# Altium PCB ESP32_BDB.PcbDoc (part 2 of 2)
Units mil, origin at the board's own origin, x right, y up, seen from the top; angles counter-clockwise.
Board outline 3000 x 3000 mil, 4 copper layers (Top Layer, Layer 1, Layer 2, Bottom Layer), stack 62.449 mil thick; 80 components, 64 nets, 287 pads, 205 vias.
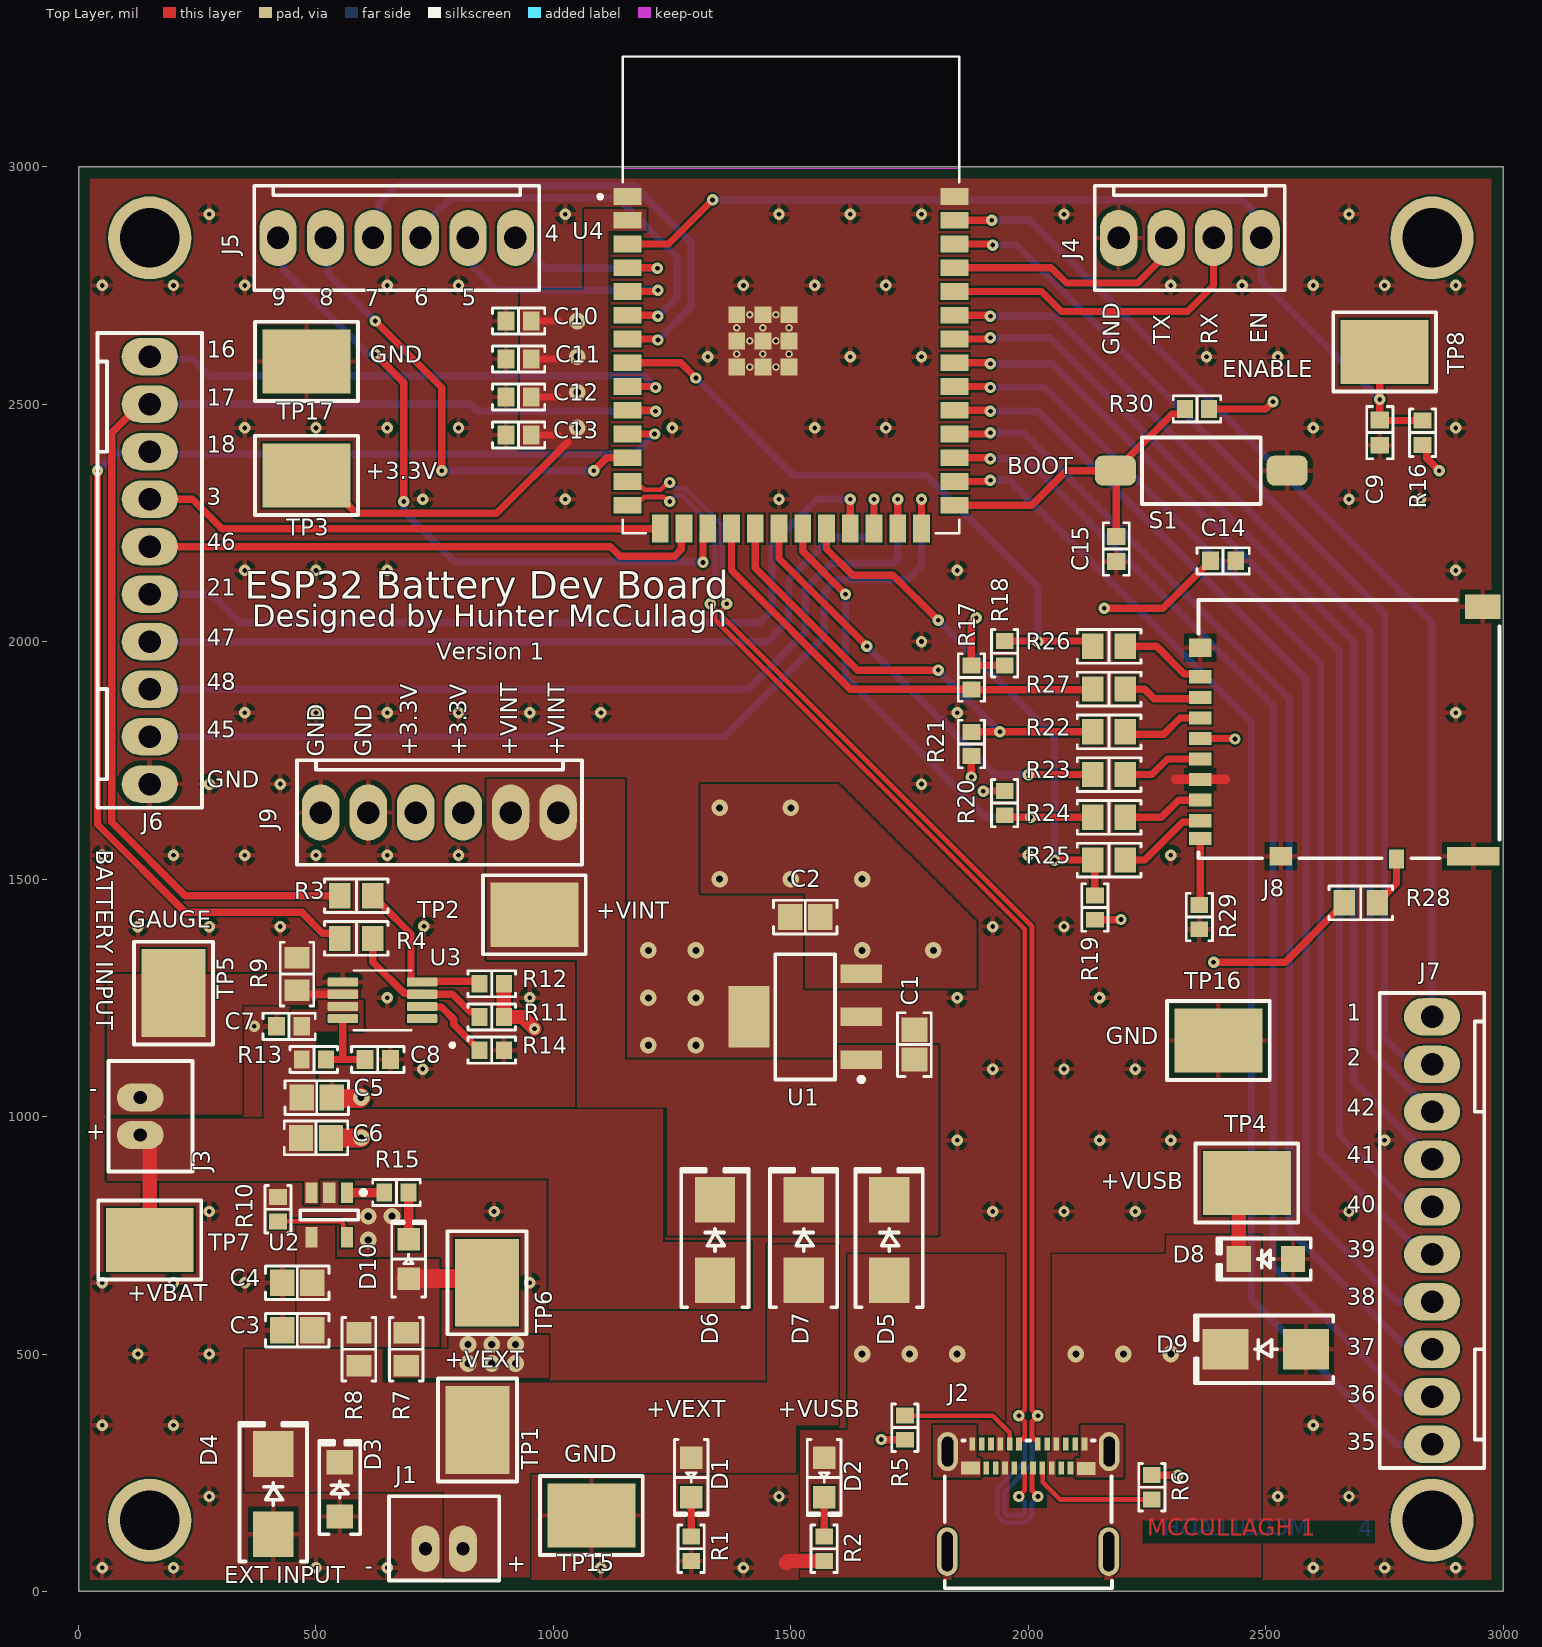
[diagram p0: Top Layer view]

## Part data (continued)
U2: library part CMP-0133-00137-1, "Miniature Single-Cell, Fully Integrated Li-Ion, Li-Polymer Charge Management Controller, 4.4V, 5-Pin SOT-23, Industrial Temperature, Tape and Reel", Code_IPC=SOT23-5, DatasheetVersion="revE, Sep-2008", PackageDescription="5-Lead Plastic Small Outline Transistor (OT) [SOT-23]", PackageReference=SOT-23-OT5, PackageVersion="revBB, Aug-2009"
U3: "Battery Battery Monitor IC Lithium Ion 8-MiniSO", Package="TSSOP-8 STMicroelectronics", Check_prices=https://www.snapeda.com/parts/STC3100IST/STMicroelectronics/view-part/?ref=eda, MF=STMicroelectronics, MP=STC3100IST, SnapEDA_Link=https://www.snapeda.com/parts/STC3100IST/STMicroelectronics/view-part/?ref=snap
U4: "Bluetooth, WiFi 802.11b/g/n, Bluetooth v5.0 Transceiver Module 2.4GHz PCB Trace Surface Mount", Package=None, Availability="In Stock", Check_prices=https://www.snapeda.com/parts/ESP32-S3-WROOM-1-N4R2/Espressif+Systems/view-part/?ref=eda, MF="Espressif Systems", MP=ESP32-S3-WROOM-1-N4R2, Price=None, Purchase-URL=https://pricing.snapeda.com/search/part/ESP32-S3-WROOM-1-N4R2/?ref=eda, SnapEDA_Link=https://www.snapeda.com/parts/ESP32-S3-WROOM-1-N4R2/Espressif+Systems/view-part/?ref=snap

## Free pads (board coordinates)
  round 175 hole 125 mask+0: 7(150,150) 7(150,2850) 7(2850,150) 7(2850,2850)

## Via types
v1: diameter 24, hole 10, Top Layer to Bottom Layer, tented both sides, 171 vias
v2: diameter 35, hole 15, Top Layer to Bottom Layer, tented both sides, 34 vias

## Nets (pads, with @x,y where several pads share a name; then routed paths per layer and width w, separated by ;. In a path a pad name is that pad's centre, name@x,y a point inside that pad or via, vN(x,y) a via of type N, cw(c..) or ccw(c..) an arc to the next point about the centre after c; other vN are vias at no path point)
+3v3: C2.2 C10.2 C11.2 C12.2 C13.2 C14.2 J8.4 J9.3 J9.4 R11.2 R12.2 R16.2 R17.2 R18.2 R19.2 R20.2 R21.2 R28.1 R30.2 TP3.1 U1.3 U4.2 | length 2216.5
  Top Layer w15: C13.2 1010,2435 ; C12.2 1010,2515 ; C11.2 1010,2595 ; C10.2 1010,2675
  Top Layer w15.33: TP3.1 505,2350 585,2270 880,2270 1030,2420 ; R21.2 v1(1880,1715) v1@1881.66,1713.34 ; v1(1890,2050) 1880,2040 R17.2 R18.2 ; v1@1905,1685.59 R20.2 ; R19.2 2194.41,1414.41 v1(2195,1415) ; v1(2160,2070) 2283.43,2070 2371.41,2157.98 2373.38,2157.98 2383.43,2168.03 C14.2 ; J8.4 2433.94,1796.06 v1(2435,1795) ; R30.2 2500,2490 v1(2515,2505) ; v1(2390,1325) 2540.55,1325 2646.64,1431.09 2650.58,1431.09 2665.55,1446.06 R28.1 ; R16.2 2838.94,2405.47 2838.94,2386.06 v1(2865,2360)
  Top Layer w30: R12.2 R11.2 935.38,1209.62 v1(960,1185)
  other v1: 1905,1685
  other v2: 1650,1350 1800,1350 1350,1500 1500,1500 1650,1500 1350,1650 1500,1650 1050,2450 1050,2525 1050,2600 1050,2675
+VBAT: C5.2 C6.2 C7.2 D6.1 J3.1 R13.1 TP7.1 U2.3 U3.7 | length 229.5
  Top Layer w30: J3.1 150,941.26 TP7.1
+VEXT: D1.1 D3.2 D4.2 D7.1 J1.1 R8.2 TP1.1
+VINT: C1.2 D5.2 D6.2 D7.2 J9.1 J9.2 TP2.1 U1.1
+VUSB: D2.1 D5.1 D8.2 D9.2 J2.A4 J2.A9 J2.B4 J2.B9 R7.2 TP4.1 | length 167.1
  Top Layer w10: TP4.1@2442.91,842.91 TP4.1
  Top Layer w30: D8.2 TP4.1@2442.91,842.91
  other v2: 820,480 870,480 920,480 1650,500 1750,500 1850,500 2100,500 2200,500 2300,500 820,520 870,520 920,520
BATTERY_GAUGE: J3.2 R9.1 TP5.1 U3.6 | length 99.9
  Top Layer w15.33: R9.1 468.14,1257.41 U3.6
D_N: J2.A7 J2.B7 U4.13 | length 2866.8
  Top Layer w10: v1@2019.68,369.68 v1(2020,370)
  Top Layer w10.26: U4.13 1168.1,2324.5 1186.74,2324.5 1191.52,2319.72 1226,2319.72 1241.28,2335 v1(1245,2335) ; v1(1365,2080) 1365,2076.63 1355.13,2066.76 1355.13,2052.87 2007.63,1400.37 2007.63,520 2007.63,420 2007.63,382.88 2020,370.51 v1(2020,370) 2020,369.49 2007.63,357.12 2007.63,325.45 2013.65,319.43 2018.91,319.43 2019.68,318.66 J2.A7 ; v1(1980,200) 1980,200.51 1992.37,212.88 1992.37,249.52 1990.16,251.73 J2.B7
  Bottom Layer w10.26: v1(1245,2335) 1245.51,2335 1257.88,2322.63 1277.33,2322.63 1355.13,2244.83 1355.13,2093.24 1365,2083.37 v1(1365,2080) ; v1(1980,200) 1980,199.49 1992.37,187.12 1992.37,166.01 1986.35,160 1956.01,160 1950,166.01 1950,210 2007.63,267.63 2007.63,357.12 2020,369.49 v1(2020,370)
D_P: J2.A6 J2.B6 U4.14 | length 2889.7
  Top Layer w10: v1(1980,370) v1@1980.32,369.68
  Top Layer w10.26: U4.14 1168.1,2299.67 1186.74,2299.67 1191.52,2304.45 1232.07,2304.45 1241.52,2295 v1(1245,2295) ; v1(1330,2080) 1330,2076.63 1339.87,2066.76 1339.87,2046.54 1992.37,1394.04 1992.37,382.88 1980,370.51 v1(1980,370) 1980,369.49 1992.37,357.12 1992.37,325.45 1986.35,319.43 1981.09,319.43 1980.32,318.66 J2.A6 ; J2.B6 2009.84,251.73 2007.63,249.52 2007.63,212.88 2020,200.51 v1(2020,200)
  Bottom Layer w10.26: v1(1245,2295) 1245.51,2295 1257.88,2307.37 1271,2307.37 1339.87,2238.5 1339.87,2093.24 1330,2083.37 v1(1330,2080) ; v1(1980,370) 1980,369.49 1992.37,357.12 1992.37,273.96 1934.74,216.32 1934.74,159.69 1949.69,144.74 1992.68,144.74 2007.63,159.69 2007.63,187.12 2020,199.49 v1(2020,200)
DAT1: R19.1 R25.1 U4.22 | length 1103.3
  Top Layer w15.33: U4.22 1575,2195 1630,2140 1715,2140 v1(1810,2045) ; v1(2055,1540) R25.1 2140,1535.55 R19.1
  Bottom Layer w15.33: v1(1810,2045) 2055,1800 v1(2055,1540)
DAT2: R18.1 R26.1 U4.8 | length 1365.2
  Top Layer w15.33: U4.8 1267.91,2587.09 v1(1300,2555) ; R18.1 2124.37,2001.18 R26.1
  Bottom Layer w15.33: v1(1300,2555) 1505,2350 1785,2350 2020,2115 v1(2020,2000)
ENABLE: C9.2 J4.1 R16.1 TP8.1 U4.3 | length 2111.1
  Top Layer w15.33: U4.3 1242.09,2837.09 v1(1335,2930) ; TP8.1 2740,2600 v1(2740,2510) C9.2 2740.98,2465.59 R16.1
  Bottom Layer w15.33: v1(1335,2930) 2450,2930 2471.39,2908.61 2471.39,2905.45 2490,2886.84 J4.1 2490,2760 v1(2740,2510)
GND: C1.1 C2.1 C3.1 C4.1 C5.1 C6.1 C7.1 C8.1 C9.1 C10.1 C11.1 C12.1 C13.1 C14.1 C15.1 D3.1 D4.1 D8.1 D9.1 J1.2 J2.A1 J2.A12 J2.B1 J2.B12 J2.S J4.4 J6.10 J8.6 J8.S J9.5 J9.6 R1.2 R2.2 R5.2 R6.2 R9.2 R10.1 R14.2 R29.1 S1.1 TP15.1 TP16.1 TP17.1 U1.2 U1.4 U2.2 U3.5 U4.1 U4.40 U4.41_1 U4.41_2 U4.41_3 U4.41_4 U4.41_5 U4.41_6 U4.41_7 U4.41_8 U4.41_9 U4.41_10 U4.41_11 U4.41_12 U4.41_13 U4.41_14 U4.41_15 U4.41_16 U4.41_17 U4.41_18 U4.41_19 U4.41_20 U4.41_21 | length 459.2
  Top Layer w15.33: v1(1690,320) 1690.59,319.41 R5.2 ; J2.S@1817,319.41 1829.92,306.49 J2.S@1829.92,294.65 ; R6.2 v1(2315,245)
  Top Layer w20: 2310,1710 2415,1710
  Top Layer w30: 1490,60 1494.41,64.41 R2.2
  Top Layer w40: C5.1 534.99,1038 593,1038 v2(595,1040) ; C6.1@537.09,962.56 531.5,956.97 C6.1 v2(595,955)
  other v1: 50,50 200,50 500,50 650,50 1100,50 1400,50 2600,50 2750,50 2900,50 275,200 1475,200 2525,200 2675,200 50,350 200,350 2600,350 125,500 275,500 50,650 200,650 350,650 950,650 275,800 875,800 1925,800 2075,800 2225,800 2675,800 1850,950 2150,950 2300,950 2750,950 725,1100 1925,1100 2075,1100 2225,1100 370,1190 650,1250 950,1250 1850,1250 2150,1250 125,1400 275,1400 425,1400 1925,1400 2075,1400 727.3,1400.53 50,1550 200,1550 350,1550 500,1550 650,1550 800,1550 2000,1550 2300,1550 275,1700 425,1700 1775,1700 350,1850 500,1850 650,1850 800,1850 950,1850 1100,1850 1850,1850 2900,1850 1775,2000 350,2150 500,2150 650,2150 1850,2150 2900,2150 725,2300 1025,2300 1475,2300 2675,2300 2825,2300 350,2450 500,2450 650,2450 800,2450 1250,2450 1550,2450 1700,2450 2600,2450 2900,2450 1325,2600 1625,2600 1775,2600 2375,2600 2525,2600 50,2750 200,2750 350,2750 650,2750 800,2750 1400,2750 1550,2750 1700,2750 2300,2750 2450,2750 2600,2750 2750,2750 2900,2750 275,2900 1025,2900 1475,2900 1625,2900 1775,2900 2075,2900 2675,2900
  other v2: 610,740 610,790 660,790 1200,1150 1300,1150 1200,1250 1300,1250 1200,1350 1300,1350
GPIO0: C15.2 R30.1 S1.2 U4.27 | length 713.2
  Top Layer w15.33: U4.27 2007.09,2287.09 2080,2360 S1.2 ; C15.2 2185,2358.19 S1.2 ; R30.1 2329.41,2488.53 2320.34,2479.46 2302.65,2479.46 2213.64,2390.45 2213.64,2383.21 2190.43,2360 S1.2
GPIO1: J7.10 U4.39 | length 2189.3
  Top Layer w15.33: U4.39 v1(1922.91,2887.09) v1@1925,2885
  Bottom Layer w15.33: v1(1922.91,2887.09) 2002.91,2887.09 2850,2040 J7.10
GPIO2: J7.9 U4.38 | length 2246
  Top Layer w15.33: U4.38 1920.57,2837.09 1922.65,2835 v1(1925,2835)
  Bottom Layer w15.33: v1(1925,2835) 1926.04,2836.04 1973.96,2836.04 2750,2060 2750,1165 2792.87,1122.13 2837.87,1122.13 J7.9
GPIO3: J6.4 U4.15 | length 1100.7
  Top Layer w15.33: J6.4 240,2300 302.13,2237.87 U4.15
GPIO4: J5.1 U4.4 | length 392.3
  Top Layer w15.33: U4.4 1217.91,2787.09 v1(1218.96,2786.04) v1@1220,2785
  Bottom Layer w15.33: J5.1 920,2847.47 956.08,2811.39 958.61,2811.39 983.96,2786.04 v1(1218.96,2786.04)
GPIO5: J5.2 U4.5 | length 540.5
  Top Layer w15.33: U4.5 1217.09,2737.09 v1(1220,2740)
  Bottom Layer w15.33: J5.2 832.13,2837.87 832.13,2787.87 880,2740 v1(1220,2740)
GPIO6: J5.3 U4.6 | length 845.3
  Top Layer w15.33: U4.6 1217.91,2687.09 v1(1220,2685)
  Bottom Layer w15.33: J5.3 720,2870 784.67,2934.67 1135.33,2934.67 1260,2810 1260,2725 v1(1220,2685)
GPIO7: J5.4 U4.7 | length 1099.8
  Top Layer w15.33: U4.7 1217.91,2637.09 v1(1220,2635)
  Bottom Layer w15.33: J5.4 632.13,2862.13 632.13,2922.13 670,2960 1170,2960 1290,2840 1290,2705 v1(1220,2635)
GPIO8: J5.5 U4.12 | length 993.2
  Top Layer w15.33: v1(625,2675) 765,2535 v1(765,2360) ; v1(1085,2360) 1111.97,2386.97 1155.39,2386.97 U4.12
  Bottom Layer w15.33: J5.5 526.11,2843.89 526.11,2773.89 v1(625,2675) ; v1(765,2360) v1(1085,2360)
GPIO9: J5.6 U4.17 | length 1443.7
  Top Layer w15.33: v1(625,2605) 685,2545 v1(685,2295) ; v1(1314.95,2166.71) 1314.95,2227.82 U4.17
  Bottom Layer w15.33: J5.6 431.11,2838.89 431.11,2783.89 608.34,2606.66 623.34,2606.66 v1(625,2605) ; v1(685,2295) 685,2275 791.63,2168.37 1313.29,2168.37 v1(1314.95,2166.71)
GPIO16: J6.1 U4.9 | length 1152.3
  Top Layer w15.33: U4.9 1205.57,2537.09 1206,2536.66 1213.34,2536.66 v1(1215,2535)
  Bottom Layer w15.33: J6.1 155,2595 240,2595 275,2560 1190,2560 v1(1215,2535)
GPIO17: J6.2 R3.1 U4.10 | length 2601.2
  Top Layer w15.33: J6.2 130,2500 70,2440 70,1620 225,1465 R3.1 ; U4.10 1210.57,2487.09 1212.65,2485 v1(1215,2485)
  Bottom Layer w15.33: J6.2 825,2500 840,2485 v1(1215,2485)
GPIO18: J6.3 R4.1 U4.11 | length 2621.3
  Top Layer w15.33: v1(40,2360) 40,1615 225,1430 470,1430 513.9,1386.1 539.45,1386.1 R4.1 ; U4.11 v1(1212.91,2437.09)
  Bottom Layer w15.33: v1(40,2360) 76.93,2396.93 146.93,2396.93 J6.3 155,2395 1170.83,2395 v1(1212.91,2437.09)
GPIO21: J6.6 U4.23 | length 1751.7
  Top Layer w15.33: U4.23 v1(1625,2300)
  Bottom Layer w15.33: J6.6 280,2100 340,2040 1435,2040 1460,2065 1460,2205 1555,2300 v1(1625,2300)
GPIO35: J7.1 U4.28 | length 2559.3
  Top Layer w15.33: U4.28 1914.74,2337.09 1917.65,2340 v1(1920,2340)
  Bottom Layer w15.33: v1(1920,2340) 1960,2340 2470,1830 2470,615 2775,310 J7.1
GPIO36: J7.2 U4.29 | length 2515.7
  Top Layer w15.33: U4.29 1917.91,2387.09 v1(1920,2385)
  Bottom Layer w15.33: v1(1920,2385) 1995,2385 2515,1865 2515,685 2781.39,418.61 2841.39,418.61 J7.2
GPIO37: J7.3 U4.30 | length 2462.2
  Top Layer w15.33: U4.30 1914.74,2437.09 1917.65,2440 v1(1920,2440)
  Bottom Layer w15.33: v1(1920,2440) 1990,2440 2550,1880 2550,760 2787.87,522.13 2837.87,522.13 J7.3
GPIO38: J7.4 U4.31 | length 2439.1
  Top Layer w15.33: U4.31 1917.91,2487.09 v1(1920,2485)
  Bottom Layer w15.33: v1(1920,2485) 2020,2485 2585,1920 2585,800 2775,610 J7.4
GPIO39: J7.5 U4.32 | length 2365.7
  Top Layer w15.33: U4.32 1915.57,2537.09 1917.65,2535 v1(1920,2535)
  Bottom Layer w15.33: v1(1920,2535) 2035,2535 2615,1955 2615,925 2830,710 J7.5
GPIO40: J7.6 U4.33 | length 2339.1
  Top Layer w15.33: U4.33 1917.91,2587.09 v1(1920,2585)
  Bottom Layer w15.33: v1(1920,2585) 2050,2585 2655,1980 2655,960 2792.87,822.13 2837.87,822.13 J7.6
GPIO41: J7.7 U4.34 | length 2266.6
  Top Layer w15.33: U4.34 1914.74,2637.09 1917.65,2640 v1(1920,2640)
  Bottom Layer w15.33: v1(1920,2640) 2045,2640 2685,2000 2685,1075 2811.39,948.61 2811.39,946.08 2847.47,910 J7.7
GPIO42: J7.8 U4.35 | length 2217.2
  Top Layer w15.33: U4.35 1917.91,2687.09 v1(1920,2685)
  Bottom Layer w15.33: v1(1920,2685) 2055,2685 2720,2020 2720,1140 2811.39,1048.61 2811.39,1046.08 2847.47,1010 J7.8
GPIO45: J6.9 U4.26 | length 2031.9
  Top Layer w15.33: U4.26 v1(1775,2300)
  Bottom Layer w15.33: J6.9 1360,1800 1570,2010 1570,2105 1595,2130 1745,2130 1775,2160 v1(1775,2300)
GPIO46: J6.5 U4.16 | length 1179.4
  Top Layer w15.33: J6.5 1120,2200 1140,2180 1255,2180 1269.38,2194.38 1269.38,2232.26 U4.16
GPIO47: J6.7 U4.24 | length 1802.8
  Top Layer w15.33: U4.24 v1(1675,2300)
  Bottom Layer w15.33: J6.7 1450,2000 1495,2045 1495,2130 1585,2220 1666.02,2220 1675,2228.98 v1(1675,2300)
GPIO48: J6.8 U4.25 | length 1929.4
  Top Layer w15.33: U4.25 v1(1725,2300)
  Bottom Layer w15.33: J6.8 1410,1900 1530,2020 1530,2110 1585,2165 1716.02,2165 1725,2173.98 v1(1725,2300)
NetC3_2: C3.2 C4.2 D10.1 R7.1 R8.1 TP6.1 U2.4 | length 173.6
  Top Layer w40: D10.1@690,658.66 851.34,658.66 TP6.1
NetC8_2: C8.2 R13.2 U3.8 | length 169
  Top Layer w15.33: R13.2 557.77,1120 ; U3.8 556.54,1121.23 557.77,1120 ; C8.2 557.77,1120
NetD1_2: D1.2 R1.1 | length 83.1
  Top Layer w15.33: R1.1 D1.2
NetD2_2: D2.2 R2.1 | length 83.1
  Top Layer w15.33: R2.1@1570,125.59 D2.2@1570,208.66
NetD10_2: D10.2 R15.2 | length 98.7
  Top Layer w20: D10.2 R15.2
NetJ2_A5: J2.A5 R5.1 | length 259.2
  Top Layer w10: R5.1 1740.59,370 1925,370 1960.63,334.37 J2.A5
NetJ2_B5: J2.B5 R6.1 | length 274.8
  Top Layer w10: J2.B5 2030.43,258.7 2030.43,229.57 2066.18,193.82 R6.1
NetJ8_1: J8.1 R26.2 | length 184
  Top Layer w15.33: R26.2 2270,1990 2328.36,1931.64 2356.28,1931.64 J8.1
NetJ8_2: J8.2 R27.2 | length 166.9
  Top Layer w15.33: R27.2 2245,1900 2265,1880 2359.25,1880 J8.2
NetJ8_3: J8.3 R22.2 | length 173.8
  Top Layer w15.33: R22.2 2209.45,1805 2285,1805 2319.37,1839.37 J8.3
NetJ8_5: J8.5 R23.2 | length 171
  Top Layer w15.33: R23.2 2260,1720 2292.76,1752.76 J8.5
NetJ8_7: J8.7 R24.2 | length 172.5
  Top Layer w15.33: R24.2 2280,1630 2316.14,1666.14 J8.7
NetJ8_8: J8.8 R25.2 | length 191.8
  Top Layer w15.33: R25.2 2245,1540 2325.27,1620.27 2359.37,1620.27 J8.8
NetJ8_10: J8.10 R28.2 | length 111.4
  Top Layer w15: R28.2 2734.45,1453.94 2749.59,1469.07 2753.52,1469.07 2775.31,1490.87 J8.10
NetR3_2: R3.2 R12.1 U3.4 | length 364
  Top Layer w15.33: R3.2 619.45,1461.06 634.42,1446.09 638.36,1446.09 700,1384.45 700,1284.98 701.98,1283.01 U3.4 725.44,1284.98 839.04,1284.98 R12.1
NetR4_2: R4.2 R11.1 U3.3 | length 323.6
  Top Layer w15.33: R4.2 619.45,1325.55 685.61,1259.39 721.49,1259.39 U3.3 787.59,1257.41 824.35,1220.65 835.34,1220.65 844.41,1211.59 R11.1
NetR10_2: R10.2 U2.5 | length 171.2
  Top Layer w10: R10.2 551.7,779.41 557.56,773.55 557.56,753.13 U2.5
NetR14_1: R14.1 U3.2 | length 166.7
  Top Layer w15.33: U3.2 724.6,1230.69 764.31,1230.69 790,1205 790,1194.03 833.38,1150.65 835.34,1150.65 844.41,1141.59 R14.1
NetR15_1: R15.1 U2.1 | length 78.6
  Top Layer w20: U2.1 R15.1
RX: J4.2 U4.36 | length 685.7
  Top Layer w15: U4.36 2027.91,2737.09 2070,2695 2335,2695 2390,2750 J4.2
SD_CLK: R23.1 U4.20 | length 911.9
  Top Layer w15.33: U4.20 1475,2175 v1(1660,1990) ; v1(2000,1720) R23.1
  Bottom Layer w15.33: v1(1660,1990) 1930,1720 v1(2000,1720)
SD_CONNECTED: J8.9 R29.2 | length 140.6
  Top Layer w15: R29.2 2361.93,1447.52 J8.9
SD_CS: R17.1 R27.1 U4.18 | length 953
  Top Layer w15.33: U4.18 1375,2150 1625,1900 1878.82,1900 R17.1 2134.37,1898.82 R27.1
SD_MISO: R20.1 R24.1 U4.21 | length 1049.7
  Top Layer w15.33: U4.21 1525,2190 v1(1615,2100) ; R20.1 1954.41,1630 R24.1
  Bottom Layer w15.33: v1(1615,2100) 1615,1925 1910,1630 v1(2005,1630)
SD_MOSI: R21.1 R22.1 U4.19 | length 996.3
  Top Layer w15.33: U4.19 1425,2155 1640,1940 v1(1810,1940) ; R21.1 R22.1
  Bottom Layer w15.33: v1(1810,1940) v1(1940,1810)
TX: J4.3 U4.37 | length 518.7
  Top Layer w15: U4.37 2047.91,2787.09 2080,2755 2230,2755 2290,2815 J4.3
pads on no net: J2.A2 J2.A3 J2.A8 J2.A10 J2.A11 J2.B2 J2.B3 J2.B8 J2.B10 J2.B11 U3.1

## Polygon pours and split planes (outlines as drawn)
GND on Top Layer "GND_L01_P018" (solid, pour order 18): 25,25 25,2975 2975,2975 2975,25
+3v3 on Top Layer "+3V3_L01_P004" (solid, pour order 4): 1530,1470 1310,1470 1310,1700 1600,1700 1890,1410 1890,1270 1530,1270
+VINT on Top Layer "+VINT_L01_P013" (solid, pour order 13): 1600,1120 1600,1150 1700,1150 1810,1150 1810,750 1240,750 1240,1020 1050,1020 1050,1330 860,1330 860,1710 1150,1710 1150,1120 1440,1120
+VUSB on Top Layer "+VUSB_L01_P008" (solid, pour order 8): 1960,320 1950,320 1950,710 1620,710 1620,340 1520,340 1520,30 2490,30 2490,750 2290,750 2290,710 2050,710 2050,320 2040,320 2040,175 1960,175
+VEXT on Top Layer "+VEXT_L01_P005" (solid, pour order 5): 770,210 770,30 950,30 950,250 1510,250 1510,350 1600,350 1600,730 1450,730 1450,440 640,440 640,510 350,510 350,210
GND on Top Layer "GND_L01_P017" (solid, pour order 17): 1360,2710 1520,2710 1520,2555 1360,2555
BATTERY_GAUGE on Top Layer "BATTERY_GAUGE_L01_P014" (solid, pour order 14): 60,1005 60,1300 495,1300 495,1270 590,1270 590,1245 490,1245 490,1235 345,1235 345,1005
+VUSB on Top Layer "+VUSB_L01_P010" (solid, pour order 10): 650,510 780,510 780,540 990,540 990,450 650,450
+3v3 on Top Layer "+3V3_L01_P009" (solid, pour order 9): 925,2405 930,2410 930,2740 1065,2740 1065,2910 1195,2910 1195,2865 1115,2865 1115,2405
GND on Top Layer "GND_L01_P002" (solid, pour order 2): 2110,350 2200,350 2200,240 2100,240 2100,280 2110,280
GND on Top Layer "GND_L01_P003" (solid, pour order 3): 1890,350 1800,350 1800,240 1900,240 1900,280 1890,280
NetC3_2 on Top Layer "NETC3_2_L01_P007" (solid, pour order 7): 460,770 540,770 540,700 760,700 760,515 460,515
+VBAT on Top Layer "+VBAT_L01_P006" (solid, pour order 6): 1230,1015 1230,735 1415,735 1415,595 990,595 990,870 511.65,870 505,870 505,815 475,815 475,865 60,865 60,995 390,995 390,1160 447.5,1160 447.5,1225 505,1225 505,1245 600,1245 600,1180 500,1180 500,1015
+3v3 on Layer 2 "+3V3_L03_P001" (solid, pour order 1): 1100,2900 1100,2700 800,2700 800,1800 660,1800 660,1400 800,1400 800,900 2100,900 2100,1300 2900,1300 2900,2700 1300,2700 1300,2900
GND on Layer 2 "GND_L03_P016" (solid, pour order 16): 25,25 25,2975 2975,2975 2975,25
+VUSB on Layer 2 "+VUSB_L03_P011" (solid, pour order 11): 780,600 780,450 2340,450 2340,600
GND on Layer 1 "GND_L02_P000" (solid, pour order 0): 25,25 25,2975 2975,2975 2975,25
GND on Bottom Layer "GND_L04_P015" (solid, pour order 15): 25,25 25,2975 2975,2975 2975,25

## Other copper
Top Layer:
  pour cut-out: 2240,150 2730,150 2730,100 2240,100
  text "MCCULLAGH 1" at 2250,105.72 h60
Layer 1:
  pour cut-out: 2240,150 2730,150 2730,100 2240,100
  text "MCCULLAGH   2" at 2250,105.72 h60
Layer 2:
  pour cut-out: 2240,150 2730,150 2730,100 2240,100
  text "MCCULLAGH     3" at 2250,105.72 h60
Bottom Layer:
  pour cut-out: 2240,150 2730,150 2730,100 2240,100
  text "MCCULLAGH" at 2590,105.72 h60
  text "4" at 2695,105 h60

## Silkscreen, mask and mechanical layers (free items; w line width, h text height)
Top Overlay:
  text "4" at 981.18,2830 h60
  text "9" at 407.18,2695.72 h60
  text "8" at 507.35,2695.72 h60
  text "6" at 707.15,2695.72 h60
  text "5" at 807.07,2695.72 h60
  text "7" at 602.4,2695 h60
  text "EN" at 2515,2626.84 h60 r90
  text "TX" at 2310,2626.37 h60 r90
  text "RX" at 2410,2624.76 h60 r90
  text "GND" at 2204.28,2603 h60 r90
  text "16" at 270,2585.72 h60
  text "GND" at 613,2575.72 h60
  text "ENABLE" at 2408,2545 h60
  text "17" at 270,2485 h60
  text "18" at 270,2385.72 h60
  text "BOOT" at 1955.02,2340.72 h60
  text "+3.3V" at 605.21,2330.72 h60
  text "3" at 270,2275.72 h60
  text "46" at 270,2180.72 h60
  text "21" at 270,2085 h60
  text "ESP32 Battery Dev Board" at 349.96,2070 h100
  text "Designed by Hunter McCullagh" at 366.04,2015.1 h80
  text "47" at 270,1980 h60
  text "Version 1" at 753.53,1950.61 h60
  text "48" at 270,1885.72 h60
  text "45" at 270,1785.72 h60
  text "+3.3V" at 724.28,1760.21 h60 r90
  text "+3.3V" at 829.28,1760.21 h60 r90
  text "+VINT" at 935,1759.85 h60 r90
  text "+VINT" at 1035,1759.85 h60 r90
  text "GND" at 529.28,1758 h60 r90
  text "GND" at 629.28,1758 h60 r90
  text "GND" at 270,1680.72 h60
  text "BATTERY INPUT" at 25.72,1562.15 h60 r270
  text "+VINT" at 1089.85,1405 h60
  text "GAUGE" at 104.23,1385.72 h60
  text "1" at 2670,1190 h60
  text "GND" at 2163,1140.72 h60
  text "2" at 2670,1095 h60
  text "-" at 22.76,1029.73 h60
  text "42" at 2670,990 h60
  text "+" at 16.57,939.45 h60
  text "41" at 2670,890 h60
  text "+VUSB" at 2152.23,835.72 h60
  text "40" at 2670,785.72 h60
  text "39" at 2670,690.72 h60
  text "+VBAT" at 102.95,600 h60
  text "38" at 2670,590.72 h60
  text "37" at 2670,485.72 h60
  text "+VEXT" at 770.89,460 h60
  text "36" at 2670,385.72 h60
  text "+VUSB" at 1472.23,355.72 h60
  text "+VEXT" at 1195.89,355 h60
  text "35" at 2670,285.72 h60
  text "GND" at 1023,260.72 h60
  text "+" at 901.57,29.45 h60
  text "-" at 602.76,24.73 h60
  text "EXT INPUT" at 307.36,5.72 h60
Board Outline:
  lines w5: 0,50 ccw(c50,50) 50,0 2950,0 ccw(c2950,50) 3000,50 3000,2950 ccw(c2950,2950) 2950,3000 50,3000 ccw(c50,2950) 0,2950 0,50

## Text inside footprints (layer, text, board x,y; h text height)
U4: Mechanical 13 "ANTENNA" at 1322.83,3104.02 h50